# Altium PCB PCB2.PcbDoc (part 1 of 2)
Units mm, origin at the board's own origin, x right, y up, seen from the top; angles counter-clockwise.
Board outline 40 x 65 mm, 2 copper layers (Top Layer, Bottom Layer); 76 components, 45 nets, 266 pads, 528 vias.
Unrouted connection lines stored in the file: 3.
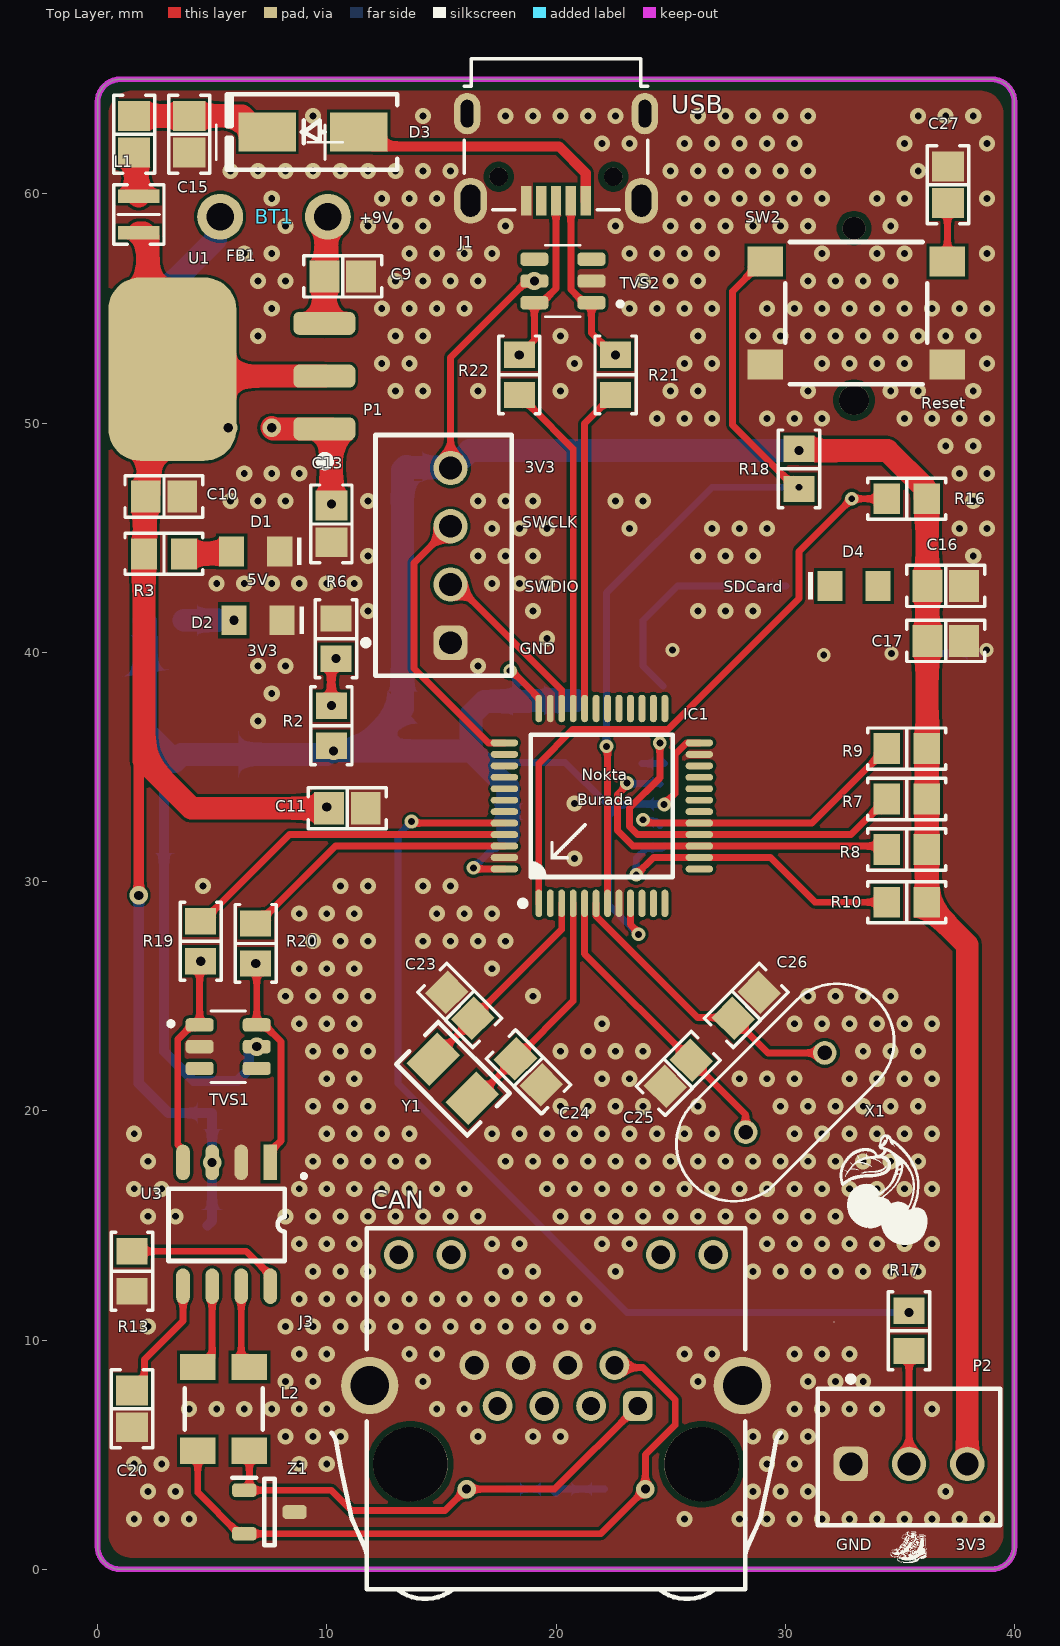
[diagram p0: Top Layer view]
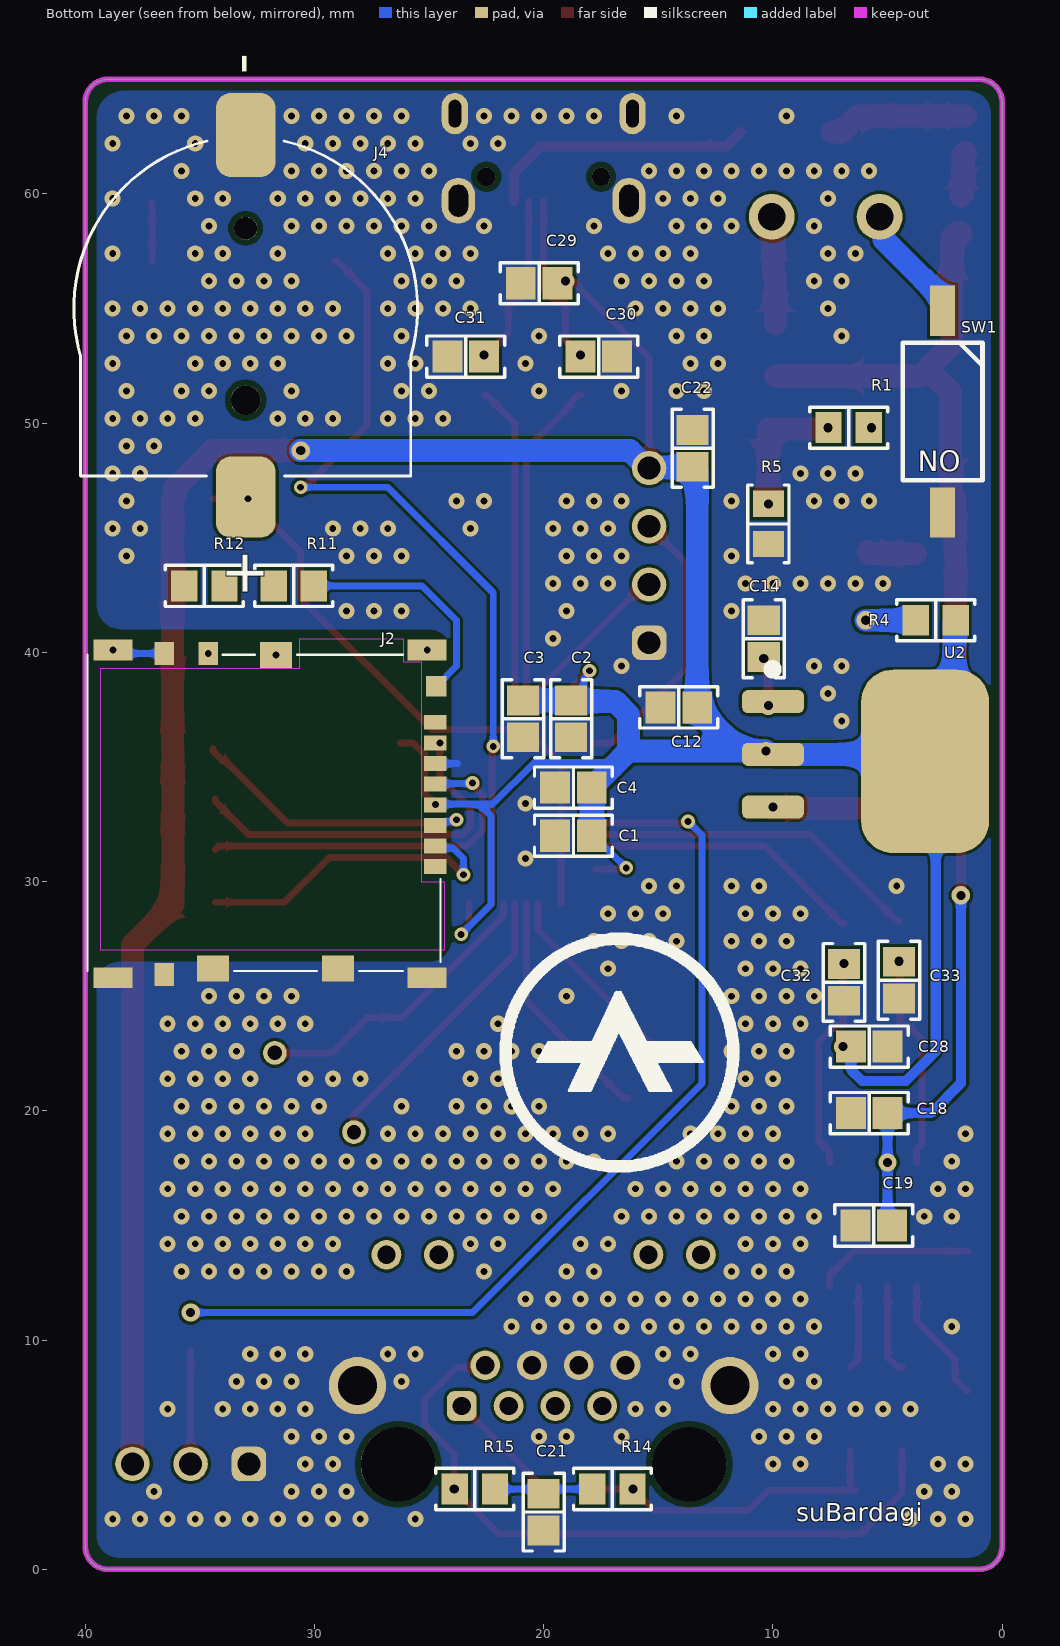
[diagram p1: Bottom Layer view, seen from below]
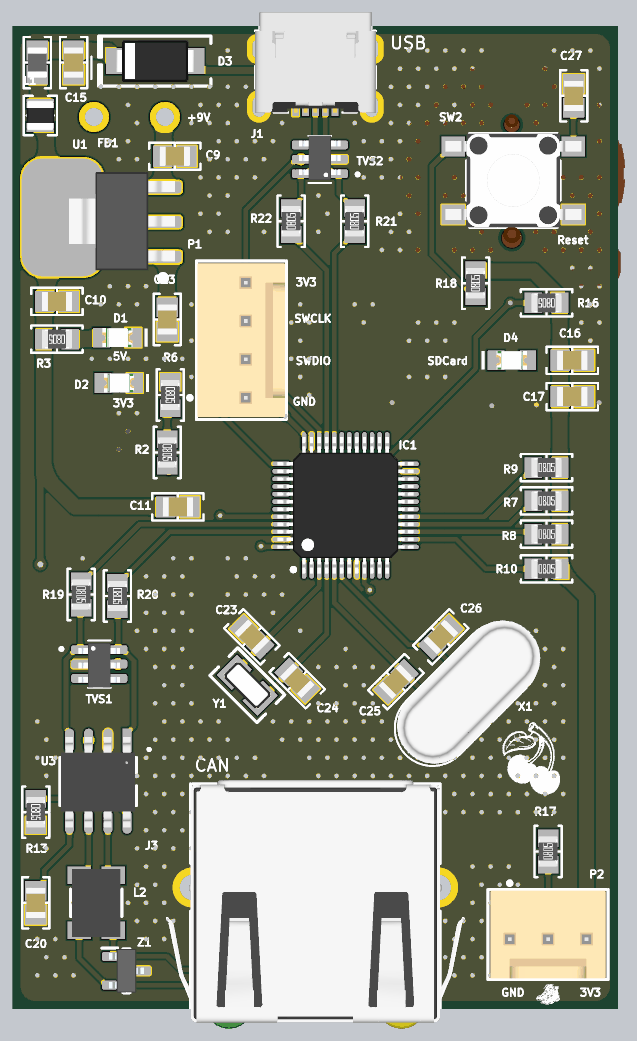
[diagram p2: 3D render of the assembled board from above, using the file's embedded part models]
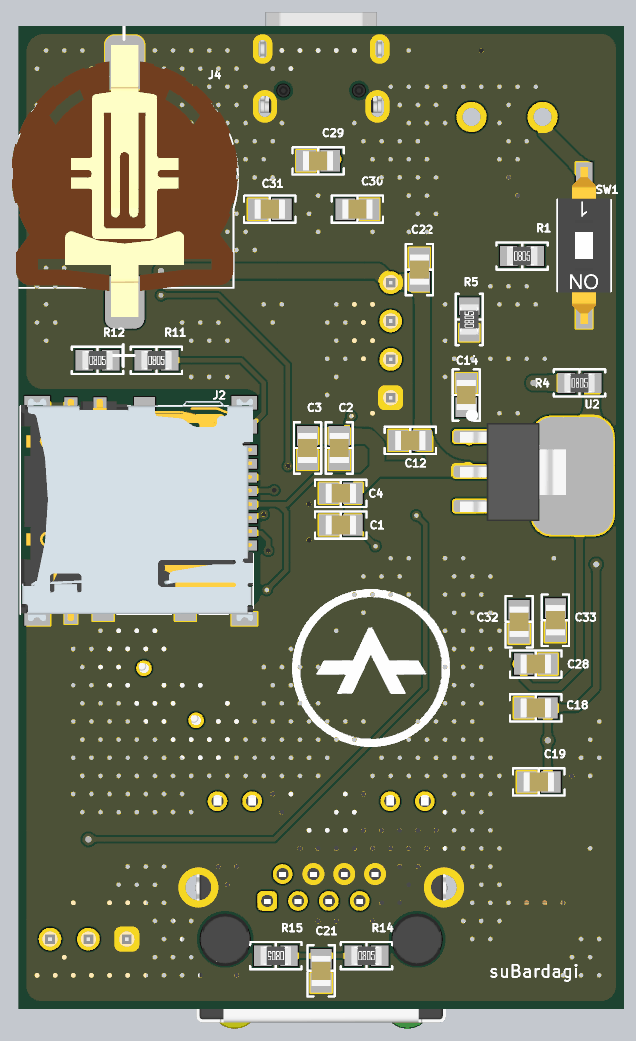
[diagram p3: 3D render of the assembled board from below, using the file's embedded part models]

## Layer stack, top to bottom
Top Solder: solder mask 0.0102, Solder Resist, Dk 3.5
Top Layer: signal copper 0.0356
Dielectric 1: dielectric 0.32, FR-4, Dk 4.8
Bottom Layer: signal copper 0.0356
Bottom Solder: solder mask 0.0102, Solder Resist, Dk 3.5

## Board outline
0,1 0,64 cw(c1,64) 1,65 39,65 cw(c39,64) 40,64 40,1 cw(c39,1) 39,0 1,0 cw(c1,1)

## Design rules (kind name [scope] priority, off if disabled: settings)
BoardOutlineClearance [All] p1: gap=0.2 ignorepadtopadclearanceinfootprint=FALSE
Clearance [All] p1: gap=0.127 ignorepadtopadclearanceinfootprint=FALSE except(0.25: Arc-Hole Track-Hole SMDPad-Hole THPad-Hole Via-Hole Fill-Hole Poly-Hole Region-Hole Text-Hole)
ComponentClearance [All] p1: gap=0.127 collisioncheckmode=3 verticalgap=0.127 showdistances=TRUE
DiffPairsRouting [All] p1: maxlimit=0.254 minlimit=0.127 mostfreqgap=0.127 toplayer_minwidth=0.127 toplayer_maxwidth=25.4 toplayer_prefwidth=0.127 bottomlayer_minwidth=0.127 bottomlayer_maxwidth=25.4 bottomlayer_prefwidth=0.127 maxuncoupledlength=12.7
Height [All] p1: minheight=0 maxheight=1816.048 prefheight=12.7
HoleSize [All] p1: absolutevalues=TRUE maxlimit=6.3 minlimit=0.3 maxpercent=80.000 minpercent=20.000
HoleToHoleClearance [All] p1: gap=0.25 allowstackedmicrovias=FALSE
MinimumAnnularRing [All] p1: minimumring=0.076
MinimumSolderMaskSliver [All] p1: minsoldermaskwidth=0
PlaneClearance [All] p1: clearance=0.127
PlaneConnect PlaneConnectPowerPads [InPadClass('PowerPads')] p1: planeconnectstyle=Direct reliefexpansion=0.508 reliefentries=4 reliefconductorwidth=0.254 reliefairgap=0.254
PlaneConnect [All] p2: pad.planeconnectstyle=Relief pad.reliefexpansion=0.3 pad.reliefentries=4 pad.reliefconductorwidth=0.127 pad.reliefairgap=0.127 via.planeconnectstyle=Direct via.reliefexpansion=0.3 via.reliefentries=4 via.reliefconductorwidth=0.127 via.reliefairgap=0.127
PolygonConnect PolygonConnect_1 [All vs IsNamedPolygon('NONET_L03_P-001')] p1: connectstyle=Direct reliefconductorwidth=0.254 reliefentries=4 polygonreliefangle="90 Angle" airgapwidth=0.254
PolygonConnect PolygonConnectPowerPads [All vs (InPadClass('PowerPads'))] p2: connectstyle=Direct reliefconductorwidth=0.254 reliefentries=4 polygonreliefangle="90 Angle" airgapwidth=0.254
PolygonConnect [All] p3: thpad.connectstyle=Relief thpad.reliefconductorwidth=0.127 thpad.reliefentries=4 thpad.polygonreliefangle="90 Angle" thpad.airgapwidth=0.127 smdpad.connectstyle=Relief smdpad.reliefconductorwidth=0.127 smdpad.reliefentries=4 smdpad.polygonreliefangle="90 Angle" smdpad.airgapwidth=0.127 via.connectstyle=Direct via.reliefconductorwidth=0.127 via.reliefentries=4 via.polygonreliefangle="90 Angle" via.airgapwidth=0.127
RoutingVias [All] p1: holewidth=0.3 width=0.6 viastyle="Through Hole" minholewidth=0.3 minwidth=0.6 maxholewidth=0.6 maxwidth=6.6
SilkToSilkClearance [All] p1: silktosilkclearance=0
SilkToSolderMaskClearance [IsPad] p1: minsilkscreentomaskgap=0.127 clearancetoexposedcopper=TRUE
SolderMaskExpansion [All] p1: expansion=0.075 istentingtop=FALSE
Width [All] p1: maxlimit=25.4 minlimit=0.127 preferedwidth=0.127 minimp=50.000000 maximp=50.000000 favimp=50.000000
20 further rules are at their usual default settings.

## Classes and differential pairs
component class Power: BT1 C1 C2 C3 C4 C9 C10 C11 C12 C13 C14 D1 D2 R1 R2 R3 R4 R5 R6 SW1 U1 U2
component class Microcontroller: C22 C23 C24 C25 C26 C27 IC1 J4 P1 P2 R16 R17 R18 SW2 X1 Y1
component class Filters: C28 C29 C30 C31 C32 C33 R19 R20 R21 R22 TVS1 TVS2
component class Communication: C15 C16 C17 C18 C19 C20 C21 D3 D4 FB1 J1 J2 J3 L1 L2 R7 R8 R9 R10 R11 R12 R13 R14 R15 U3 Z1

## Components (designator, comment, footprint, x,y, rotation, side; value= is the part's Value field where it differs from the comment)
BT1 "1294" BAT_1294 7.7,59 r270 top
C1 "10 µF" "CAP 0805_2012" 18.7,32 r0 bottom
C2 "10000 pF" "CAP 0805_2012" 18.8,37.1 r90 bottom
C3 "10 µF" "CAP 0805_2012" 20.9,37.1 r270 bottom
C4 "10000 pF" "CAP 0805_2012" 18.7,34.1 r180 bottom
C9 "10 µF" "CAP 0805_2012" 10.7,56.4 r180 top
C10 "100 µF" "CAP 0805_2012" 2.9,46.8 r180 top
C11 "10 µF" "CAP 0805_2012" 10.9,33.2 r180 top
C12 "100 µF" "CAP 0805_2012" 14.1,37.6 r180 bottom
C13 "10 µF" "CAP 0805_2012" 10.2,45.6 r90 top
C14 "10 µF" "CAP 0805_2012" 10.4,40.6 r270 bottom
C15 "0.1 µF" "CAP 0805_2012" 4,62.6 r90 top
C16 "0.1 µF" "CAP 0805_2012" 37,42.9 r180 top
C17 "10 µF" "CAP 0805_2012" 37,40.5 r180 top
C18 "0.1 µF" "CAP 0805_2012" 5.8,19.9 r180 bottom
C19 "10 µF" "CAP 0805_2012" 5.6,15 r0 bottom
C20 "10 µF" "CAP 0805_2012" 1.5,7 r90 top
C21 "4.7 µF" "CAP 0805_2012" 20,2.5 r90 bottom
C22 "0.1 µF" "CAP 0805_2012" 13.5,48.9 r90 bottom
C23 "1 pF" "CAP 0805_2012" 15.8,24.6 r315 top
C24 "1 pF" "CAP 0805_2012" 18.8,21.7 r135 top
C25 "18 pF" "CAP 0805_2012" 25.334,21.634 r45 top
C26 "18 pF" "CAP 0805_2012" 28.3,24.6 r225 top
C27 "0.1 µF" "CAP 0805_2012" 37.1,60.4 r270 top
C28 "0.1 µF" "CAP 0805_2012" 5.8,22.8 r0 bottom
C29 "0.1 µF" "CAP 0805_2012" 20.2,56.1 r180 bottom
C30 "2.2 µF" "CAP 0805_2012" 17.6,52.9 r0 bottom
C31 "2.2 µF" "CAP 0805_2012" 23.4,52.9 r180 bottom
C32 "2.2 µF" "CAP 0805_2012" 6.9,25.6 r90 bottom
C33 "2.2 µF" "CAP 0805_2012" 4.5,25.7 r90 bottom
D1 "Green, 3.2V, 140°" WL-SMCW_0805_150080xx75000 6.9,44.4 r180 top
D2 "Green, 3.2V, 140°" WL-SMCW_0805_150080xx75000 7,41.4 r180 top
D3 "BZG03C100-M3-08" "DO214AC SMA" 9.4,62.7 r180 top
D4 "Green, 3.2V, 140°" WL-SMCW_0805_150080xx75000 33,42.9 r0 top
FB1 "40 Ohms @ 100MHz" "FER 0805_2012" 1.6,62.6 r90 top
IC1 "STM32F103C6T7A" "ST LQFP-48 7X7MM" 22,33.3 r90 top
J1 "629105150521" 629105150521 20,62.6 r180 top
J2 "693071030811" 693071030811 32.2,33 r270 bottom
J3 "615008142121" 615008142121 20,7 r0 top
J4 "BC501SM-TR" "*MPD_BC501SM-TR_BC501SM-TR(Primary) - duplicate" 33,55 r270 bottom
L1 "22 µH" "IND 0806_2016" 1.8,59.1 r90 top
L2 "5000Ohm" WE-CNSW_1812 5.5,7 r270 top
P1 "61900411121" 61900411121 15.1,44.23 r270 top
P2 "61900311121" 61900311121 35.4,4.9 r180 top
R1 "130 Ohms" "RES 0805_2012" 6.7,49.8 r180 bottom
R2 "130 Ohms" "RES 0805_2012" 10.2,36.8 r270 top
R3 "470 Ohms" "RES 0805_2012" 2.9,44.3 r180 top
R4 "330 Ohms" "RES 0805_2012" 2.9,41.4 r180 bottom
R5 "390 Ohms" "RES 0805_2012" 10.2,45.6 r90 bottom
R6 "220 Ohms" "RES 0805_2012" 10.4,40.6 r270 top
R7 "10 kOhms" "RES 0805_2012" 35.3,33.6 r0 top
R8 "10 kOhms" "RES 0805_2012" 35.3,31.4 r0 top
R9 "10 kOhms" "RES 0805_2012" 35.3,35.8 r0 top
R10 "10 kOhms" "RES 0805_2012" 35.3,29.1 r0 top
R11 "0 Ohms" "RES 0805_2012" 30.9,42.9 r180 bottom
R12 "470 Ohms" "RES 0805_2012" 34.8,42.9 r180 bottom
R13 "10 kOhms" "RES 0805_2012" 1.5,13 r270 top
R14 "61.9 Ohms" "RES 0805_2012" 17,3.5 r180 bottom
R15 "61.9 Ohms" "RES 0805_2012" 23,3.5 r0 bottom
R16 "0 Ohms" "RES 0805_2012" 35.3,46.7 r180 top
R17 "10 kOhms" "RES 0805_2012" 35.4,10.4 r90 top
R18 "10 kOhms" "RES 0805_2012" 30.6,48 r90 top
R19 "56 Ohms" "RES 0805_2012" 4.5,27.4 r270 top
R20 "56 Ohms" "RES 0805_2012" 6.9,27.3 r270 top
R21 "56 Ohms" "RES 0805_2012" 22.6,52.1 r90 top
R22 "56 Ohms" "RES 0805_2012" 18.4,52.1 r90 top
SW1 "418121270801" 418121270801 2.6,50.5 r0 bottom
SW2 "430152043826" WS-TASV_L6W6H4.3_4301x20438x6 33.1,54.8 r0 top
TVS1 "SZTVS4201MR6T1G" SOP95P275X110-6N 5.7,22.8 r0 top
TVS2 "SZTVS4201MR6T1G" SOP95P275X110-6N 20.3,56.2 r180 top
U1 "LM1117IMPX-ADJ" "SOT-223-4 M" 7.2,52.1 r180 top
U2 "LM1117IMPX-ADJ" "SOT-223-4 M" 7.3,35.5 r180 bottom
U3 "MCP2551" MCP2551T-I/SN 5.75,15 r270 top
X1 "ECS-100-20-4VX" XTAL_ECS-100-20-4VX 30,20.8 r45 top
Y1 "32.768 kHz" "ABRACON ABS07" 15.5,21.4 r315 top
Z1 "PESD2CAN,215" SOT95P230X110-3N 7.5,2.5 r0 top

## Footprints (in the part's own frame and the unit in brackets; to place one, negate y for a bottom-side part, rotate by r counter-clockwise, add the part's x,y. Pads: shape width x height; smd on the part's side, far side on the other; paste and mask are expansions set on the pad)
61900311121 [mm] "2.54mm Male Locking Header, 3p"
  rrect50% 1.5x1.5 hole 1: 1(2.54,0.3)
  round 1.5 hole 1: 2(0,0.3) 3(-2.54,0.3)
  silkscreen extent -3.98,-3.52 3.98,2.98, body extent -3.81,-2.9 3.81,2.9, height 11.53
61900411121 [mm] "2.54mm Male Locking Header, 4p"
  rrect50% 1.5x1.5 hole 1: 1(3.81,0.3)
  round 1.5 hole 1: 2(1.27,0.3) 3(-1.27,0.3) 4(-3.81,0.3)
  silkscreen extent -5.25,-3.52 5.25,2.98, body extent -5.08,-2.9 5.08,2.9, height 11.53
418121270801 [mm] "2.54 mm small compact SMD with raised actuator, 01p"
  rect 1.1x2.2 smd: 1(0,-4.4) 2(0,4.4)
  silkscreen extent -1.74,-3 1.74,3, body extent -1.74,-5.2 1.74,5.2, height 3.77
615008142121 [mm] "Modular Jack Horizontal Shielded with LED and EMI Panel Finger 8P8C Tab Up"
  rrect50% 1.3x1.3 hole 0.8: 1(3.57,0.125)
  round 1.3 hole 0.8: 2(2.55,1.905) 3(1.53,0.125) 4(0.51,1.905) 5(-0.51,0.125) 6(-1.53,1.905) 7(-2.55,0.125) 8(-3.57,1.905) 9(6.86,6.725) 10(4.57,6.725) 11(-4.57,6.725) 12(-6.86,6.725)
  round 3.25 hole 3.25 unplated: M1(-6.35,-2.415) M2(6.35,-2.415)
  round 2.5 hole 1.7: Shell(-8.125,1.015) Shell(8.125,1.015)
  silkscreen extent -9.79,-8.29 9.79,7.87, body extent -9.88,-8.33 9.88,8.12, height 15.13
629105150521 [mm] "Micro USB 2.0 SMT Type B Horizontal 5 Contacts High Current"
  rect 0.45x1.3 smd: 1(-1.3,2.9) 2(-0.65,2.9) 3(0,2.9) 4(0.65,2.9) 5(1.3,2.9)
  round 0.8 hole 0.8 unplated: MH1(-2.5,1.85) MH2(2.5,1.85)
  oval 1.15x1.8 hole 0.55 slot 1.2 at 90 deg: Shell(-3.875,-0.9) Shell(3.875,-0.9)
  oval 1.45x2 hole 0.85 slot 1.4 at 90 deg: Shell(-3.725,2.9) Shell(3.725,2.9)
  silkscreen extent -4,-3.3 4,3.3, body extent -4,-3.3 4,3.3, height 2.75
693071030811 [mm] "Micro SD Card Connector"
  rect 0.65x1 smd: 1(2.35,7.47) 2(1.45,7.47) 3(0.55,7.47) 4(-0.35,7.47) 5(-1.25,7.47) 6(-2.15,7.47) 7(-3.05,7.47) 8(-3.95,7.47)
  rect 0.9x0.9 smd: 9(-5.52,7.52)
  rect 1.13x1.4 smd: 10(-6.89,0.52) 11(6.79,-2.23) 11(6.79,3.22)
  rect 0.9x1.7 smd: 11(-7.1,-6.58) 11(-7.1,7.12) 11(7.2,-6.58) 11(7.2,7.12)
  rect 1x0.85 smd: 11(-6.95,-4.36) 11(-6.95,-2.43) 11(7.05,-4.36)
  Top Layer keep-out region: -7.6,1.57 -7.6,6.07 -6.6,6.07 -6.6,6.87 3,6.87 3,7.87 6,7.87 6,-7.13 -6.3,-7.13 -6.3,1.57
  silkscreen extent -6.9,-7.7 6.9,7.7, body extent -7.36,-7.65 7.36,7.7, height 1.3
"*MPD_BC501SM-TR_BC501SM-TR(Primary) - duplicate" [mm]
  rrect50% 3.66x2.6 smd: NEG(-7.57,0)
  round 1 hole 1 unplated: None(-3.5,0)
  round 1.3 hole 1.3 unplated: None(4,0)
  rrect50% 3.54x2.6 smd: POS(8.23,0)
  silkscreen extent -7.3,-7.49 7.3,7.49, body extent -8.75,-7.49 9.25,7.49, height 4.2
"ABRACON ABS07" [mm] "Crystal, 2-Leads, Body 3.20x1.50mm, IPC Medium Density"
  rect 1.4x1.9 smd: 1(-1.2,0) 2(1.2,0)
  silkscreen extent -2.2,-1.3 2.2,1.3, body extent -1.62,-0.77 1.63,0.78, height 0.9
BAT_1294 [mm]
  round 2 hole 1.2: N(0,-2.35) P(0,2.35)
  silkscreen extent -4,-2.52 -2.5,2.98
"CAP 0805_2012" [mm] "Chip Capacitor, 2-Leads, Body 2.00x1.20mm, IPC Medium Density"
  rect 1.3x1.4 smd: 1(-0.8,0) 2(0.8,0)
  silkscreen extent -1.7,-0.9 1.7,0.9, body extent -1,-0.64 1,0.64, height 1.26
"DO214AC SMA" [mm] "Molded Diode, 2-Leads, Body 4.30x2.60mm, IPC Medium Density"
  rect 2.5x1.7 smd: 1(-2,0) 2(2,0)
  silkscreen extent -3.68,-1.65 3.75,1.65, body extent -2.6,-1.37 2.6,1.37, height 2.4
"FER 0805_2012" [mm] "Chip Ferrite, 2-Leads, Body 2.00x1.20mm, IPC Medium Density"
  rect 1.3x1.4 smd: 1(-0.8,0) 2(0.8,0)
  silkscreen extent -1.7,-0.9 1.7,0.9, body extent -1,-0.64 1,0.64, height 1.26
"IND 0806_2016" [mm] "Chip Capacitor, 2-Leads, Body 2.00x1.20mm, IPC Medium Density"
  rect 0.6x1.8 smd: 1(-0.8,0) 2(0.8,0)
  silkscreen extent -1.3,-1.1 1.3,1.1, body extent -1.01,-0.91 1.01,0.91, height 1.81
MCP2551T-I/SN [mm]
  rect 1.55x0.6 smd: 1(-2.75,1.79)
  oval 1.55x0.6 smd: 2(-2.75,0.52) 3(-2.75,-0.75) 4(-2.75,-2.02) 5(2.65,-2.02) 6(2.65,-0.75) 7(2.65,0.52) 8(2.65,1.79)
  silkscreen extent -2.2,-2.65 1.55,3.3, body extent -2.99,-2.59 3.01,2.32, height 1.76
"RES 0805_2012" [mm] "Chip Resistor, 2-Leads, Body 2.00x1.25mm, IPC Medium Density"
  rect 1.15x1.35 smd: 1(-0.875,0) 2(0.875,0)
  silkscreen extent -1.7,-0.9 1.7,0.9, body extent -1,-0.62 1,0.63, height 0.6
SOP95P275X110-6N [mm]
  rrect50% 1.22x0.58 smd: 1(-1.245,0.95) 2(-1.245,0) 3(-1.245,-0.95) 4(1.245,-0.95) 5(1.245,0) 6(1.245,0.95)
  silkscreen extent -2.6,-1.56 0.75,1.56, body extent -1.38,-1.57 1.38,1.39, height 1.1
SOT95P230X110-3N [mm]
  rrect50% 1.05x0.6 smd: 1(-1.1,0.95) 2(-1.1,-0.95) 3(1.1,0)
  silkscreen extent -1.63,-1.45 0.23,1.5, body extent -1.15,-1.45 1.15,1.45, height 1.1
"SOT-223-4 M" [mm]
  rrect50% 2.7x1 smd paste-0.102 mask+0.051: 1(-2.696,2.351) 2(-2.696,0.051) 3(-2.696,-2.249)
  rrect50% 5.588x8.001 smd paste-0.102 mask+0.051: 4(3.937,-0.254)
  silkscreen extent -2.92,3.56 -2.52,3.96, body extent -3.5,-3.25 3.5,3.25, height 1.63
"ST LQFP-48 7X7MM" [mm] "LQFP, 48-Leads, Body 7.00x7.00mm, Pitch 0.50mm, IPC Medium Density"
  oval 1.2x0.3 smd: 1(-4.25,2.75) 2(-4.25,2.25) 3(-4.25,1.75) 4(-4.25,1.25) 5(-4.25,0.75) 6(-4.25,0.25) 7(-4.25,-0.25) 8(-4.25,-0.75) 9(-4.25,-1.25) 10(-4.25,-1.75) 11(-4.25,-2.25) 12(-4.25,-2.75) 25(4.25,-2.75) 26(4.25,-2.25) 27(4.25,-1.75) 28(4.25,-1.25) 29(4.25,-0.75) 30(4.25,-0.25) 31(4.25,0.25) 32(4.25,0.75) 33(4.25,1.25) 34(4.25,1.75) 35(4.25,2.25) 36(4.25,2.75)
  oval 0.3x1.2 smd: 13(-2.75,-4.25) 14(-2.25,-4.25) 15(-1.75,-4.25) 16(-1.25,-4.25) 17(-0.75,-4.25) 18(-0.25,-4.25) 19(0.25,-4.25) 20(0.75,-4.25) 21(1.25,-4.25) 22(1.75,-4.25) 23(2.25,-4.25) 24(2.75,-4.25) 37(2.75,4.25) 38(2.25,4.25) 39(1.75,4.25) 40(1.25,4.25) 41(0.75,4.25) 42(0.25,4.25) 43(-0.25,4.25) 44(-0.75,4.25) 45(-1.25,4.25) 46(-1.75,4.25) 47(-2.25,4.25) 48(-2.75,4.25)
  silkscreen extent -4.37,-3.1 3.1,3.57, body extent -4.51,-4.51 4.51,4.51, height 1.55
WE-CNSW_1812 [mm] "SMT Common Mode Line Filter, 4-leads, body 4.50x3.20mm"
  rect 1.15x1.55 smd: 1(-1.825,-1.125) 2(1.825,-1.125) 3(1.825,1.125) 4(-1.825,1.125)
  silkscreen extent -0.9,-1.7 0.9,1.7, body extent -2.25,-1.6 2.25,1.6, height 2.84
WL-SMCW_0805_150080xx75000 [mm] "SMD Mono-color Chip LED, body 2.0x1.25mm"
  rect 1.1x1.3 smd: 1(-1.05,0) 2(1.05,0)
  silkscreen extent -2,-0.6 -1.8,0.6, body extent -1,-0.63 1,0.62, height 0.7
WS-TASV_L6W6H4.3_4301x20438x6 [mm] "SMD Tact Switch, body 6x6mm"
  rect 1.55x1.3 smd: A1(-3.975,2.25) A2(3.975,2.25) B1(-3.975,-2.25) B2(3.975,-2.25)
  silkscreen extent -3.1,-3.1 3.1,3.1, body extent -4.5,-3.1 4.5,3.1, height 4.3
XTAL_ECS-100-20-4VX [mm]
  round 1.03 hole 0.63: 1(-2.44,0) 2(2.44,0)
  silkscreen extent -5.67,-2.5 5.67,2.5, body extent -5.47,-2.5 5.88,2.5, height 2.1

## Part data
BT1: library part Bat-1294, "9V battery holder", Package=None, Availability=Unavailable, MP=1294, Price=None
C1 C3: library part C0805C106K3PAC7800, "CAP CER 10UF 25V X5R 0805", Device Package="0805 (2012 Metric)", Manufacturer=KEMET, Operating Temperature="-55°C ~ 85°C", Supplier Part Number 1=399-11939-1-ND, Temperature Coefficient=X5R, Tolerance=±10%, Voltage - Rated=25V, Applications="Bypass, Decoupling", Capacitance="10 µF", ComponentLink1Description=Datasheet, ComponentLink1URL=https://api.kemet.com/component-edge/download/datasheet/C0805C106K3PAC7800.pdf, ComponentLink2Description="DigiKey Link", ComponentLink2URL=https://www.digikey.com/en/products/detail/kemet/C0805C106K3PAC7800/5267604, lastupdated="9.02.2024 20:15:18", Lifecycle Status=Active, Minimum Order=1, Mounting Type="Surface Mount, MLCC", Package / Case="0805 (2012 Metric)", Packaging=TapeAndReel, Part Number=C0805C106K3PAC7800, Part Status=Active, partid=18542, Price=0.03, Series="SMD Comm X5R", Size / Dimension="0.079\" L x 0.049\" W (2.00mm x 1.25mm)", Supplier 1=DigiKey, Thickness (Max)="0.057\" (1.45mm)"
C2 C4: library part C0805C103J3GECAUTO, "CAP CER 0805 10NF 25V C0G 5%", Device Package="0805 (2012 Metric)", Manufacturer=KEMET, Operating Temperature="-55°C ~ 125°C", Ratings=AEC-Q200, Supplier Part Number 1=399-C0805C103J3GECAUTOCT-ND, Temperature Coefficient="C0G, NP0", Tolerance=±5%, Voltage - Rated=25V, Applications="Automotive, ESD Protection", Capacitance="10000 pF", ComponentLink1Description=Datasheet, ComponentLink1URL=https://api.kemet.com/component-edge/download/datasheet/C0805C103J3GECAUTO.pdf, ComponentLink2Description="DigiKey Link", ComponentLink2URL=https://www.digikey.com/en/products/detail/kemet/C0805C103J3GECAUTO/8647361, Features="Low ESL", lastupdated="9.02.2024 20:15:09", Lifecycle Status=Active, Minimum Order=1, Mounting Type="Surface Mount, MLCC", Package / Case="0805 (2012 Metric)", Packaging=TapeAndReel, Part Number=C0805C103J3GECAUTO, Part Status=Active, partid=32681, Price=0.05, Series="ESD SMD Auto C0G", Size / Dimension="0.079\" L x 0.049\" W (2.00mm x 1.25mm)", Supplier 1=DigiKey, Thickness (Max)="0.039\" (1.00mm)"
C9 C11 C13 C14 C19 C20: library part CL21Y106KPQVPNE, "CAP CER 10UF 10V X7S 0805", Part Number=CL21Y106KPQVPNE
C10 C12: library part PMK212BBJ107MG-T, "CAP CER 100UF 2.5V X5R 0805", Part Number=PMK212BBJ107MG-T
C15 C16 C18 C22 C27 C28 C29: library part CC0805MRX7R9BB104, "CAP CER 0.1UF 50V X7R 0805", Device Package="0805 (2012 Metric)", Manufacturer=Yageo, Operating Temperature="-55°C ~ 125°C", Supplier Part Number 1=311-4351-1-ND, Temperature Coefficient=X7R, Tolerance=±20%, Voltage - Rated=50V, Applications="General Purpose", Capacitance="0.1 µF", ComponentLink1Description=Datasheet, ComponentLink1URL=https://www.yageo.com/upload/media/product/productsearch/datasheet/mlcc/UPY-GPHC_X7R_6.3V-to-50V_18.pdf, ComponentLink2Description="DigiKey Link", ComponentLink2URL=https://www.digikey.com/en/products/detail/yageo/CC0805MRX7R9BB104/5884281, lastupdated="9.02.2024 20:16:09", Lifecycle Status=Active, Minimum Order=1, Mounting Type="Surface Mount, MLCC", Package / Case="0805 (2012 Metric)", Packaging=TapeAndReel, Part Number=CC0805MRX7R9BB104, Part Status=Active, partid=2475, Price=0.01, Series=CC, Size / Dimension="0.079\" L x 0.049\" W (2.00mm x 1.25mm)", Supplier 1=DigiKey, Thickness (Max)="0.037\" (0.95mm)"
C17: library part CL21Y106KPQVPNE, "CAP CER 10UF 10V X7S 0805", Device Package="0805 (2012 Metric)", Manufacturer="Samsung Electro-Mechanics", Operating Temperature="-55°C ~ 125°C", Ratings=AEC-Q200, Supplier Part Number 1=1276-6685-1-ND, Temperature Coefficient=X7S, Tolerance=±10%, Voltage - Rated=10V, Applications=Automotive, Capacitance="10 µF", ComponentLink1Description=Datasheet, ComponentLink1URL=http://www.samsungsem.com/kr/support/product-search/mlcc/CL21Y106KPQVPNE.jsp, ComponentLink2Description="DigiKey Link", ComponentLink2URL=https://www.digikey.com/en/products/detail/samsung-electro-mechanics/CL21Y106KPQVPNE/5961169, lastupdated="9.02.2024 20:16:08", Lifecycle Status=Active, Minimum Order=1, Mounting Type="Surface Mount, MLCC", Package / Case="0805 (2012 Metric)", Packaging=TapeAndReel, Part Number=CL21Y106KPQVPNE, Part Status=Active, partid=2979, Price=0.06, Series=CL, Size / Dimension="0.079\" L x 0.049\" W (2.00mm x 1.25mm)", Supplier 1=DigiKey, Thickness (Max)="0.055\" (1.40mm)"
C21: library part CL21B475KAFNNNE, "CAP CER 4.7UF 25V X7R 0805", Device Package="0805 (2012 Metric)", Manufacturer="Samsung Electro-Mechanics", Operating Temperature="-55°C ~ 125°C", Supplier Part Number 1=1276-2969-1-ND, Temperature Coefficient=X7R, Tolerance=±10%, Voltage - Rated=25V, Applications="General Purpose", Capacitance="4.7 µF", ComponentLink1Description=Datasheet, ComponentLink1URL=http://www.samsungsem.com/kr/support/product-search/mlcc/CL21B475KAFNNNE.jsp, ComponentLink2Description="DigiKey Link", ComponentLink2URL=https://www.digikey.com/en/products/detail/samsung-electro-mechanics/CL21B475KAFNNNE/3888627, lastupdated="9.02.2024 20:16:07", Lifecycle Status=Active, Minimum Order=1, Mounting Type="Surface Mount, MLCC", Package / Case="0805 (2012 Metric)", Packaging=TapeAndReel, Part Number=CL21B475KAFNNNE, Part Status=Active, partid=3072, Price=0.08, Series=CL, Size / Dimension="0.079\" L x 0.049\" W (2.00mm x 1.25mm)", Supplier 1=DigiKey, Thickness (Max)="0.053\" (1.35mm)"
C23 C24: library part CC0805CRNPO9BN1R0, "CAP CER 1PF 50V C0G/NPO 0805", Device Package="0805 (2012 Metric)", Manufacturer=Yageo, Operating Temperature="-55°C ~ 125°C", Supplier Part Number 1=311-1089-1-ND, Temperature Coefficient="C0G, NP0", Tolerance=±0.25pF, Voltage - Rated=50V, Applications="General Purpose", Capacitance="1 pF", ComponentLink1Description=Datasheet, ComponentLink1URL=https://www.yageo.com/upload/media/product/productsearch/datasheet/mlcc/UPY-GP_NP0_16V-to-50V_17.pdf, ComponentLink2Description="DigiKey Link", ComponentLink2URL=https://www.digikey.com/en/products/detail/yageo/CC0805CRNPO9BN1R0/302823, lastupdated="9.02.2024 20:15:42", Lifecycle Status=Active, Minimum Order=1, Mounting Type="Surface Mount, MLCC", Package / Case="0805 (2012 Metric)", Packaging=TapeAndReel, Part Number=CC0805CRNPO9BN1R0, Part Status=Active, partid=12750, Price=0.01, Series=CC, Size / Dimension="0.079\" L x 0.049\" W (2.00mm x 1.25mm)", Supplier 1=DigiKey, Thickness (Max)="0.024\" (0.60mm)"
C25 C26: library part VJ0805A180JXXCW1BC, "CAP CER 18PF 25V C0G/NP0 0805", Device Package="0805 (2012 Metric)", Manufacturer="Vishay Vitramon", Operating Temperature="-55°C ~ 125°C", Supplier Part Number 1=720-VJ0805A180JXXCW1BCCT-ND, Temperature Coefficient="C0G, NP0", Tolerance=±5%, Voltage - Rated=25V, Applications="General Purpose", Capacitance="18 pF", ComponentLink1Description=Datasheet, ComponentLink1URL=https://www.vishay.com/docs/28548/vjw1bcbascomseries.pdf, ComponentLink2Description="DigiKey Link", ComponentLink2URL=https://www.digikey.com/en/products/detail/vishay-vitramon/VJ0805A180JXXCW1BC/8307782, lastupdated="9.02.2024 20:15:03", Lifecycle Status=Active, Minimum Order=1, Mounting Type="Surface Mount, MLCC", Package / Case="0805 (2012 Metric)", Packaging=TapeAndReel, Part Number=VJ0805A180JXXCW1BC, Part Status=Active, partid=31672, Price=0.01, Series="VJ W1BC", Size / Dimension="0.079\" L x 0.049\" W (2.00mm x 1.25mm)", Supplier 1=DigiKey, Thickness (Max)="0.028\" (0.70mm)"
C30 C31 C32 C33: library part TMK212B7225MG-TR, "CAP CER 2.2UF 25V X7R 0805", Device Package="0805 (2012 Metric)", Manufacturer="Taiyo Yuden", Operating Temperature="-55°C ~ 125°C", Supplier Part Number 1=587-4932-1-ND, Temperature Coefficient=X7R, Tolerance=±20%, Voltage - Rated=25V, Applications="SMPS Filtering", Capacitance="2.2 µF", ComponentLink1Description=Datasheet, ComponentLink1URL=https://www.yuden.co.jp/productdata/catalog/mlcc01_e.pdf, ComponentLink2Description="DigiKey Link", ComponentLink2URL=https://www.digikey.com/en/products/detail/taiyo-yuden/TMK212B7225MG-TR/6563525, lastupdated="9.02.2024 20:16:05", Lifecycle Status=Active, Minimum Order=1, Mounting Type="Surface Mount, MLCC", Package / Case="0805 (2012 Metric)", Packaging=TapeAndReel, Part Number=TMK212B7225MG-TR, Part Status=Active, partid=3807, Price=0.04, Series=M, Size / Dimension="0.079\" L x 0.049\" W (2.00mm x 1.25mm)", Supplier 1=DigiKey, Thickness (Max)="0.053\" (1.35mm)"
D1 D2 D4: library part 150080GS75000, "WL-SMCW Mono-color Chip LED Waterclear, size 0805, Green, 3.2V, 140°", Case/Size Code=0805, Emitting Color=Green, Forward Voltage=3.2V, Manufacturer="Wurth Elektronik", Operating Temperature Max=85°C, Operating Temperature Min=-40°C, Category="Signal LEDs", Chip Technology=InGaN, ComponentLink1Description="Website Link", ComponentLink1URL=https://www.we-online.com/redexpert/article/150080GS75000?ad, ComponentLink2Description="Datasheet Link", ComponentLink2URL=https://www.we-online.com/redexpert/spec/150080GS75000?ad, Dominant Wavelength=525nm, Height=0.7mm, Length=2mm, Luminous Intensity=450mcd, Manufacturer Part Number=150080GS75000, Match Code=WL-SMCW, Mount="Surface Mount", Packaging="Tape and Reel", Peak Wavelength=515nm, Viewing Angle=140°, Width=1.25mm
D3: "DIODE ZENER 100V 1.25W DO214AC", Current - Reverse Leakage @ Vr="1µA @ 75V", Manufacturer="Vishay Semiconductor Diodes Division", Operating Temperature="150°C (TJ)", Package / Case="DO-214AC, SMA", Power - Max=1.25W, Supplier Device Package="DO-214AC (SMA)", Supplier Part Number 1=BZG03C100-M3-08GICT-ND, Tolerance=±6%, Voltage - Forward (Vf) (Max) @ If="1.2V @ 500mA", Voltage - Zener (Nom) (Vz)=100V, ComponentLink1Description=Datasheet, ComponentLink1URL=http://www.vishay.com/docs/86138/bzg03c-m-series.pdf, ComponentLink2Description="DigiKey Link", ComponentLink2URL=http://digikey.com/product-detail/en/vishay-semiconductor-diodes-division/BZG03C100-M3-08/BZG03C100-M3-08GICT-ND/8554991, lastupdated="3.06.2024 19:55:28", Lifecycle Status=Active, Minimum Order=1, Mounting Type="Surface Mount", Packaging=TapeAndReel, Part Number=BZG03C100-M3-08, Part Status=Active, partid=1296, Price=0.18, Series=BZG03C-M, Supplier 1=DigiKey, Impedance (Max) (Zzt)="200 Ohms"
FB1: library part ILBB0805ER400V, "FERRITE BEAD 40 OHM 0805 1LN", Current Rating (Max)=300mA, DC Resistance (DCR) (Max)=150mOhm, Manufacturer="Vishay Dale", Package / Case="0805 (2012 Metric)", Supplier Part Number 1=ILBB0805ER400V-ND, ComponentLink1Description=Datasheet, ComponentLink1URL=https://www.vishay.com/docs/34025/ilbb0805.pdf, ComponentLink2Description="DigiKey Link", ComponentLink2URL=http://digikey.com/product-detail/en/vishay-dale/ILBB0805ER400V/ILBB0805ER400V-ND/2574916, Height (Max)="0.043\" (1.10mm)", lastupdated="30.08.2020 20:58:50", Lifecycle Status=Active, Minimum Order=8000, Mounting Type="Surface Mount", Number of Lines=1, Packaging=TapeAndReel, Part Number=ILBB0805ER400V, partid=2358, Price=0.02, Series=ILBB-0805, Size / Dimension="0.079\" L x 0.049\" W (2.00mm x 1.25mm)", Supplier 1=DigiKey, Impedance @ Frequency="40 Ohms @ 100MHz"
IC1: "IC MCU 32BIT 32KB FLASH 48LQFP", Device Package=48-LQFP, Manufacturer=STMicroelectronics, Operating Temperature="-40°C ~ 105°C (TA)", Supplier Device Package="48-LQFP (7x7)", Supplier Part Number 1=497-11516-ND, Voltage - Supply (Vcc/Vdd)="2V ~ 3.6V", ComponentLink1Description=Datasheet, ComponentLink1URL=http://www.st.com/content/ccc/resource/technical/document/datasheet/0d/93/e0/d7/77/bf/4c/54/CD00210843.pdf/files/CD00210843.pdf/jcr:content/translations/en.CD00210843.pdf, ComponentLink2Description="DigiKey Link", ComponentLink2URL=//digikey.com/product-detail/en/stmicroelectronics/STM32F103C6T7A/497-11516-ND/2035348, Connectivity="CANbus, I²C, IrDA, LINbus, SPI, UART/USART, USB", Core Processor="ARM® Cortex®-M3", Core Size=32-Bit, Data Converters="A/D 10x12b", lastupdated="4.12.2019 05:20:26", Lifecycle Status=0, Minimum Order=1, Mounting Type="Surface Mount", Number of I/O=37, Oscillator Type=Internal, Package / Case=48-LQFP, Packaging=Tray, Part Number=STM32F103C6T7A, Part Status=Active, partid=102, Peripherals="DMA, Motor Control PWM, PDR, POR, PVD, PWM, Temp Sensor, WDT", Price=4.52, Program Memory Size="32KB (32K x 8)", Program Memory Type=FLASH, RAM Size="10K x 8", Series=STM32F1, Speed=72MHz, Supplier 1=DigiKey
J1: "WR-COM Micro USB 2.0 SMT Type B Horizontal 5 Contacts High Current", Manufacturer="Wurth Elektronik", Operating Temperature Max=85°C, Operating Temperature Min=-40°C, Rated Current=3A, Working Voltage="30V (AC)", Application="Micro USB 2.0", Category="Input/Output Connectors", ComponentLink1Description="Website Link", ComponentLink1URL=https://www.we-online.com/redexpert/article/629105150521?ad, ComponentLink2Description="Datasheet Link", ComponentLink2URL=https://www.we-online.com/redexpert/spec/629105150521?ad, Gender=Receptacle, Manufacturer Part Number=629105150521, Match Code=WR-USB, Mount="Surface Mount", Number of Pins=5, Number of Ports=1, Orientation=Horizontal, Packaging="Tape and Reel", Interface Type="Type B"
J2: "WR-CRD Micro SD Card Connector Push & Push", Contact Resistance=100mOhm, Manufacturer="Wurth Elektronik", Operating Temperature Max=85°C, Operating Temperature Min=-25°C, Rated Current=0.5A, Withstanding Voltage=500VAC, Working Voltage=30VAC, Category="Input/Output Connectors", ComponentLink1Description="Website Link", ComponentLink1URL=https://www.we-online.com/redexpert/article/693071030811?ad, ComponentLink2Description="Datasheet Link", ComponentLink2URL=https://www.we-online.com/redexpert/spec/693071030811?ad, Gender=Socket, Manufacturer Part Number=693071030811, Match Code=WR-CRD, Mount="Surface Mount", Number of Pins=8, Packaging="Tape and Reel", Type="Push & Push"
J3: "WR-MJ Modular Jack THT Horizontal Shielded 8P8C Tab Up", Contact Resistance=20mOhm, Manufacturer="Wurth Elektronik", Operating Temperature Max=85°C, Operating Temperature Min=-40°C, Rated Current=1.5A, Withstanding Voltage=1000VAC, Working Voltage=120VAC, Insulation Resistance=500MOhm, Category="Input/Output Connectors", ComponentLink1Description="Website Link", ComponentLink1URL=https://www.we-online.com/redexpert/article/615008142121?ad, ComponentLink2Description="Datasheet Link", ComponentLink2URL=https://www.we-online.com/redexpert/spec/615008142121?ad, LED="Bipolar Y/G", Manufacturer Part Number=615008142121, Match Code=WR-MJ, Mount="Through Hole", Number of Pins=8P8C, Number of Ports=1, Orientation=Horizontal, Packaging=Tray, Shielding=Yes
J4: "Holder Coin Cell For Cr1220 Smd", Package="DFN-8 MPD", Digi-Key_Part_Number=BC501SM-TRCT-ND, Digi-Key_Purchase_URL=https://www.digikey.com/product-detail/en/mpd-memory-protection-devices/BC501SM-TR/BC501SM-TRCT-ND/5418194?utm_source=snapeda&utm_medium=aggregator&utm_campaign=symbol, MF="MPD _Memory", MP=BC501SM-TR, SnapEDA_Link=https://www.snapeda.com/parts/BC501SM-TR/MPD%20%28Memory%20Protection%20Devices%29/view-part/479427/?ref=snap
L1: library part LSQPB201616T220M, "FIXED IND 22UH 310MA 1 OHM SMD", Current Rating (Amps)="310 mA", DC Resistance (DCR)="1.3Ohm Max", Device Package="0806 (2016 Metric)", Frequency - Self Resonant=24MHz, Manufacturer="Taiyo Yuden", Operating Temperature="-40°C ~ 105°C", Supplier Device Package=0806, Supplier Part Number 1=587-LSQPB201616T220MCT-ND, Tolerance=±20%, Inductance Frequency - Test="100 kHz", ComponentLink1Description=Datasheet, ComponentLink1URL=https://mm.digikey.com/Volume0/opasdata/d220001/medias/docus/6025/LSQPB201616T220M_SS.pdf, ComponentLink2Description="DigiKey Link", ComponentLink2URL=https://www.digikey.com/en/products/detail/taiyo-yuden/LSQPB201616T220M/16660797, Height - Seated (Max)="0.071\" (1.80mm)", lastupdated="3.06.2024 20:13:57", Lifecycle Status=Active, Material - Core=Ferrite, Minimum Order=1, Mounting Type="Surface Mount", Package / Case="0806 (2016 Metric)", Packaging=TapeAndReel, Part Number=LSQPB201616T220M, partid=7265, Price=0.09, Series=LSQP, Shielding=Unshielded, Size / Dimension="0.079\" L x 0.063\" W (2.00mm x 1.60mm)", Supplier 1=DigiKey, Type=Wirewound, Inductance="22 µH"
L2: library part 744235101, "WE-CNSW SMT Common Mode Line Filter, size 1812, 5000Ohm, 100uH, 60V", Case/Size Code=1812, DC Resistance Max=2Ohm, Manufacturer="Wurth Elektronik", Operating Temperature Max=125°C, Operating Temperature Min=-40°C, Rated Current=0.15A, Rated Voltage=60V, Inductance=100uH, Insulation Test Voltage (AC)=125V, Category="Common Mode Chokes", ComponentLink1Description="Website Link", ComponentLink1URL=https://www.we-online.com/redexpert/article/744235101?ad, ComponentLink2Description="Datasheet Link", ComponentLink2URL=https://www.we-online.com/redexpert/spec/744235101?ad, Height=2.8mm, Length=4.5mm, Manufacturer Part Number=744235101, Match Code=WE-CNSW, Mount="Surface Mount", Packaging="Tape and Reel", Width=3.2mm, Winding Style=bifiliar, Impedance @10MHz=5000Ohm
P1: "WR-WTB THT Male Vertical Locking Header, pitch 2.54mm, 4pins", Contact Resistance=20mOhm, Manufacturer="Wurth Elektronik", Operating Temperature Max=105°C, Operating Temperature Min=-40°C, Rated Current=3A, Withstanding Voltage=1000VAC, Working Voltage=250VAC, Category="Wire-to-Board Connectors", ComponentLink1Description="Website Link", ComponentLink1URL=https://www.we-online.com/redexpert/article/61900411121?ad, ComponentLink2Description="Datasheet Link", ComponentLink2URL=https://www.we-online.com/redexpert/spec/61900411121?ad, Gender=Male, Height=11.5mm, Length=10.16mm, Manufacturer Part Number=61900411121, Match Code=WR-WTB, Mount="Through Hole", Number of Pins=4, Number of Rows=1, Orientation=Vertical, Packaging=Bag, Pitch=2.54mm, Width=5.8mm
P2: "WR-WTB THT Male Vertical Locking Header, pitch 2.54mm, 3pins", Contact Resistance=20mOhm, Manufacturer="Wurth Elektronik", Operating Temperature Max=105°C, Operating Temperature Min=-40°C, Rated Current=3A, Withstanding Voltage=1000VAC, Working Voltage=250VAC, Category="Wire-to-Board Connectors", ComponentLink1Description="Website Link", ComponentLink1URL=https://www.we-online.com/redexpert/article/61900311121?ad, ComponentLink2Description="Datasheet Link", ComponentLink2URL=https://www.we-online.com/redexpert/spec/61900311121?ad, Gender=Male, Height=11.5mm, Length=7.62mm, Manufacturer Part Number=61900311121, Match Code=WR-WTB, Mount="Through Hole", Number of Pins=3, Number of Rows=1, Orientation=Vertical, Packaging=Bag, Pitch=2.54mm, Width=5.8mm
R1 R2: library part 3-2176091-5, "RES SMD 130 OHM 0.1% 1/4W 0805", Device Package="0805 (2012 Metric)", Manufacturer="TE Connectivity Passive Product", Operating Temperature="-55°C ~ 155°C", Power (Watts)="0.25W, 1/4W", Supplier Device Package=0805, Supplier Part Number 1=A110458CT-ND, Temperature Coefficient=±25ppm/°C, Tolerance=±0.1%, ComponentLink1Description=Datasheet, ComponentLink1URL=https://www.te.com/commerce/DocumentDelivery/DDEController?Action=srchrtrv&DocNm=1773272&DocType=DS&DocLang=English, ComponentLink2Description="DigiKey Link", ComponentLink2URL=https://www.digikey.com/en/products/detail/te-connectivity-passive-product/3-2176091-5/4033926, Composition="Thin Film", Height - Seated (Max)="0.026\" (0.65mm)", lastupdated="8.02.2024 21:00:46", Lifecycle Status=Active, Minimum Order=1, Number of Terminations=2, Package / Case="0805 (2012 Metric)", Packaging=TapeAndReel, Part Number=3-2176091-5, Part Status=Active, partid=49761, Price=0.14, Resistance="130 Ohms", Series="RP73P, Holsworthy", Size / Dimension="0.079\" L x 0.049\" W (2.00mm x 1.25mm)", Supplier 1=DigiKey
R3 R12: library part 3430A2F470RTDF, "3430 A2 1% 470R 100PPM 1K RL", Device Package="0805 (2012 Metric)", Manufacturer="TE Connectivity Passive Product", Operating Temperature="-55°C ~ 155°C", Power (Watts)=1W, Ratings=AEC-Q200, Supplier Device Package=0508, Supplier Part Number 1=1712-3430A2F470RTDFCT-ND, Temperature Coefficient=±100ppm/°C, Tolerance=±1%, ComponentLink2Description="DigiKey Link", ComponentLink2URL=https://www.digikey.com/en/products/detail/te-connectivity-passive-product/3430A2F470RTDF/17763718, Composition="Thick Film", Features="Automotive AEC-Q200", Height - Seated (Max)="0.026\" (0.65mm)", lastupdated="8.02.2024 21:00:03", Lifecycle Status=Active, Minimum Order=1, Number of Terminations=2, Package / Case="0805 (2012 Metric)", Packaging=TapeAndReel, Part Number=3430A2F470RTDF, Part Status=Active, partid=77780, Price=0.02, Resistance="470 Ohms", Series=3430, Size / Dimension="0.049\" L x 0.079\" W (1.25mm x 2.00mm)", Supplier 1=DigiKey
R4: library part 3430A2F330RTDF, "3430 A2 1% 330R 100PPM 1K RL", Device Package="0805 (2012 Metric)", Manufacturer="TE Connectivity Passive Product", Operating Temperature="-55°C ~ 155°C", Power (Watts)=1W, Ratings=AEC-Q200, Supplier Device Package=0508, Supplier Part Number 1=1712-3430A2F330RTDFCT-ND, Temperature Coefficient=±100ppm/°C, Tolerance=±1%, ComponentLink2Description="DigiKey Link", ComponentLink2URL=https://www.digikey.com/en/products/detail/te-connectivity-passive-product/3430A2F330RTDF/17762827, Composition="Thick Film", Features="Automotive AEC-Q200", Height - Seated (Max)="0.026\" (0.65mm)", lastupdated="8.02.2024 21:00:04", Lifecycle Status=Active, Minimum Order=1, Number of Terminations=2, Package / Case="0805 (2012 Metric)", Packaging=TapeAndReel, Part Number=3430A2F330RTDF, Part Status=Active, partid=77524, Price=0.02, Resistance="330 Ohms", Series=3430, Size / Dimension="0.049\" L x 0.079\" W (1.25mm x 2.00mm)", Supplier 1=DigiKey
R5: library part 3430A2F390RTDF, "3430 A2 1% 390R 100PPM 1K RL", Device Package="0805 (2012 Metric)", Manufacturer="TE Connectivity Passive Product", Operating Temperature="-55°C ~ 155°C", Power (Watts)=1W, Ratings=AEC-Q200, Supplier Device Package=0508, Supplier Part Number 1=1712-3430A2F390RTDFCT-ND, Temperature Coefficient=±100ppm/°C, Tolerance=±1%, ComponentLink2Description="DigiKey Link", ComponentLink2URL=https://www.digikey.com/en/products/detail/te-connectivity-passive-product/3430A2F390RTDF/17763108, Composition="Thick Film", Features="Automotive AEC-Q200", Height - Seated (Max)="0.026\" (0.65mm)", lastupdated="8.02.2024 21:00:03", Lifecycle Status=Active, Minimum Order=1, Number of Terminations=2, Package / Case="0805 (2012 Metric)", Packaging=TapeAndReel, Part Number=3430A2F390RTDF, Part Status=Active, partid=77771, Price=0.02, Resistance="390 Ohms", Series=3430, Size / Dimension="0.049\" L x 0.079\" W (1.25mm x 2.00mm)", Supplier 1=DigiKey
R6: library part CPF0805B220RE1, "RES SMD 220 OHM 0.1% 1/10W 0805", Device Package="0805 (2012 Metric)", Manufacturer="TE Connectivity Passive Product", Operating Temperature="-55°C ~ 155°C", Power (Watts)="0.1W, 1/10W", Supplier Device Package=0805, Supplier Part Number 1=A103177CT-ND, Temperature Coefficient=±25ppm/°C, Tolerance=±0.1%, ComponentLink1Description=Datasheet, ComponentLink1URL=https://www.te.com/commerce/DocumentDelivery/DDEController?Action=srchrtrv&DocNm=1773200&DocType=DS&DocLang=English, ComponentLink2Description="DigiKey Link", ComponentLink2URL=https://www.digikey.com/en/products/detail/te-connectivity-passive-product/CPF0805B220RE1/2382016, Composition="Thin Film", Height - Seated (Max)="0.026\" (0.65mm)", lastupdated="8.02.2024 21:02:21", Lifecycle Status=Active, Minimum Order=1, Number of Terminations=2, Package / Case="0805 (2012 Metric)", Packaging=TapeAndReel, Part Number=CPF0805B220RE1, Part Status=Active, partid=31853, Price=0.12, Resistance="220 Ohms", Series="CPF, Neohm", Size / Dimension="0.079\" L x 0.049\" W (2.00mm x 1.25mm)", Supplier 1=DigiKey
R7 R8 R9 R10 R13 R17 R18: library part 2176093-5, "RES SMD 10K OHM 0.1% 1/4W 0805", Device Package="0805 (2012 Metric)", Manufacturer="TE Connectivity Passive Product", Operating Temperature="-55°C ~ 155°C", Power (Watts)="0.25W, 1/4W", Supplier Device Package=0805, Supplier Part Number 1=A110639CT-ND, Temperature Coefficient=±25ppm/°C, Tolerance=±0.1%, ComponentLink1Description=Datasheet, ComponentLink1URL=https://www.te.com/commerce/DocumentDelivery/DDEController?Action=srchrtrv&DocNm=1773272&DocType=DS&DocLang=English, ComponentLink2Description="DigiKey Link", ComponentLink2URL=https://www.digikey.com/en/products/detail/te-connectivity-passive-product/2176093-5/4034107, Composition="Thin Film", Height - Seated (Max)="0.026\" (0.65mm)", lastupdated="8.02.2024 21:02:35", Lifecycle Status=Active, Minimum Order=1, Number of Terminations=2, Package / Case="0805 (2012 Metric)", Packaging=TapeAndReel, Part Number=2176093-5, Part Status=Active, partid=28478, Price=0.14, Resistance="10 kOhms", Series="RP73P, Holsworthy", Size / Dimension="0.079\" L x 0.049\" W (2.00mm x 1.25mm)", Supplier 1=DigiKey
R11 R16: library part 5107, "RES 0 OHM JUMPER 0805", Device Package="0805 (2012 Metric)", Manufacturer="Keystone Electronics", Power (Watts)="0.5W, 1/2W", Supplier Device Package=0805, Supplier Part Number 1=36-5107CT-ND, Tolerance=Jumper, ComponentLink1Description=Datasheet, ComponentLink1URL=http://www.keyelco.com/product-pdf.cfm?p=14350, ComponentLink2Description="DigiKey Link", ComponentLink2URL=https://www.digikey.com/en/products/detail/keystone-electronics/5107/7942981, Composition="Metal Element", Height - Seated (Max)="0.033\" (0.84mm)", lastupdated="8.02.2024 21:01:23", Lifecycle Status=Active, Minimum Order=1, Number of Terminations=2, Package / Case="0805 (2012 Metric)", Packaging=TapeAndReel, Part Number=5107, Part Status=Active, partid=45276, Price=0.16, Resistance="0 Ohms", Series=-, Size / Dimension="0.079\" L x 0.049\" W (2.00mm x 1.25mm)", Supplier 1=DigiKey
R14 R15: library part 2176091-4, "RES SMD 61.9 OHM 0.1% 1/4W 0805", Device Package="0805 (2012 Metric)", Manufacturer="TE Connectivity Passive Product", Operating Temperature="-55°C ~ 155°C", Power (Watts)="0.25W, 1/4W", Supplier Device Package=0805, Supplier Part Number 1=A110427CT-ND, Temperature Coefficient=±25ppm/°C, Tolerance=±0.1%, ComponentLink1Description=Datasheet, ComponentLink1URL=https://www.te.com/commerce/DocumentDelivery/DDEController?Action=srchrtrv&DocNm=1773272&DocType=DS&DocLang=English, ComponentLink2Description="DigiKey Link", ComponentLink2URL=https://www.digikey.com/en/products/detail/te-connectivity-passive-product/2176091-4/4033895, Composition="Thin Film", Height - Seated (Max)="0.026\" (0.65mm)", lastupdated="8.02.2024 21:01:14", Lifecycle Status=Active, Minimum Order=1, Number of Terminations=2, Package / Case="0805 (2012 Metric)", Packaging=TapeAndReel, Part Number=2176091-4, Part Status=Active, partid=46762, Price=0.14, Resistance="61.9 Ohms", Series="RP73P, Holsworthy", Size / Dimension="0.079\" L x 0.049\" W (2.00mm x 1.25mm)", Supplier 1=DigiKey
R19 R20 R21 R22: library part CPF0805B56RE1, "RES SMD 56 OHM 0.1% 1/10W 0805", Device Package="0805 (2012 Metric)", Manufacturer="TE Connectivity Passive Product", Operating Temperature="-55°C ~ 155°C", Power (Watts)="0.1W, 1/10W", Supplier Device Package=0805, Supplier Part Number 1=A103223CT-ND, Temperature Coefficient=±25ppm/°C, Tolerance=±0.1%, ComponentLink1Description=Datasheet, ComponentLink1URL=https://www.te.com/commerce/DocumentDelivery/DDEController?Action=srchrtrv&DocNm=1773200&DocType=DS&DocLang=English, ComponentLink2Description="DigiKey Link", ComponentLink2URL=https://www.digikey.com/en/products/detail/te-connectivity-passive-product/CPF0805B56RE1/2382003, Composition="Thin Film", Height - Seated (Max)="0.026\" (0.65mm)", lastupdated="8.02.2024 21:02:01", Lifecycle Status=Active, Minimum Order=1, Number of Terminations=2, Package / Case="0805 (2012 Metric)", Packaging=TapeAndReel, Part Number=CPF0805B56RE1, Part Status=Active, partid=36553, Price=0.12, Resistance="56 Ohms", Series="CPF, Neohm", Size / Dimension="0.079\" L x 0.049\" W (2.00mm x 1.25mm)", Supplier 1=DigiKey
SW1: "WS-DISV Small Compact SMT Dip Switch, Raised Actuator, pitch 2.54mm, 1p", Manufacturer="Wurth Elektronik", Operating Temperature Max=85°C, Operating Temperature Min=-40°C, Rated Current Non-Switching=100mA, Rated Current Switching=25mA, Rated Voltage Non-Switching=50VDC, Rated Voltage Switching=24VDC, Actuator Type="Raise Type", Category="Dip Switches", ComponentLink1Description="Website Link", ComponentLink1URL=https://www.we-online.com/redexpert/article/418121270801?ad, ComponentLink2Description="Datasheet Link", ComponentLink2URL=https://www.we-online.com/redexpert/spec/418121270801?ad, Contact Material="Copper Alloy", Contact Plating=Gold, Manufacturer Part Number=418121270801, Match Code=WS-DISV, Mount="Surface Mount", Number of Poles=1, Operation Force=600g, Packaging="Tape and Reel", Pitch=2.54mm
SW2: "WS-TASV SMT Tact Switch, L6 x W6 x H4.3mm, 260g, SPST-NO, 12V, 50mA", Manufacturer="Wurth Elektronik", Operating Temperature Max=85°C, Operating Temperature Min=-40°C, Rated Current=50mA, Rated Voltage (DC)=12V, Category="Tact Switches", Circuit=SPST-NO, ComponentLink1Description="Website Link", ComponentLink1URL=https://www.we-online.com/redexpert/article/430152043826?ad, ComponentLink2Description="Datasheet Link", ComponentLink2URL=https://www.we-online.com/redexpert/spec/430152043826?ad, Contact Material="Stainless Steel", Contact Plating=Silver, Height=4.3mm, Length=6mm, Manufacturer Part Number=430152043826, Match Code=WS-TASV, Mount="Surface Mount", Operation Force=260g, Packaging="Tape and Reel", Terminal Material="Copper Alloy", Terminal Plating=Silver, Washable=No, Width=6mm
TVS1 TVS2: library part SZTVS4201MR6T1G_1, Mfr_Name=onsemi, Supplier Part Number 1=863-SZTVS4201MR6T1G, Copyright="Copyright (C) 2021 Ultra Librarian. All rights reserved.", Manufacturer_Part_Number=SZTVS4201MR6T1G, RefDes=RefDes, Supplier 1=Mouser, Type=DEV
U1 U2: "LDO Regulator Pos 3.3V 0.8A 4-Pin(3+Tab) SOT-223 T/R", Case/Package=SOT-223, Dropout Voltage=1.2V, Manufacturer="Texas Instruments", Manufacturer Part Number=LM1117IMPX-3.3, Max Operating Temperature=125°C, Max Output Current=800mA, Max Input Voltage=15V, Min Operating Temperature=-40°C, Output Voltage=3.3V, Output Voltage Accuracy=1%, Package Quantity=2000, Quiescent Current=15mA, Supplier Part Number 1=926-M1117IMPXADJNOPB, Accuracy=1%, Category="Voltage Regulators - Linear", ComponentLink1Description=https://datasheet.ciiva.com/6588/lm1117-n-6588632.pdf?src-supplier=Digi-Key, ComponentLink1URL=https://datasheet.ciiva.com/6588/lm1117-n-6588632.pdf?src-supplier=Digi-Key, ComponentLink2Description=https://datasheet.ciiva.com/6588/lm1117-n-6588636.pdf?src-supplier=Digi-Key, ComponentLink2URL=https://datasheet.ciiva.com/6588/lm1117-n-6588636.pdf?src-supplier=Digi-Key, ComponentLink3Description=https://datasheet.ciiva.com/6588/lm1117-n-6588639.pdf?src-supplier=Digi-Key, ComponentLink3URL=https://datasheet.ciiva.com/6588/lm1117-n-6588639.pdf?src-supplier=Digi-Key, Lead Free="Contains Lead", Min Current Limit=800mA, Mount="Surface Mount", Number of Outputs=1, Number of Pins=4, Number of Regulators=1, Output Current=800mA, Output Type=Fixed, Packaging="Tape and Reel", Polarity=Positive, RoHS=No, Supplier 1=Mouser
U3: "MCP2551 CAN Transreciever 8Mbit/sn", Operating Temperature="-40°C ~ 125°C", Supplier Part Number 1=MCP2551-I/SN, Virtual Junction Temperature (Tvj)="-40°C ~ 150°C", Datasheet=https://www.nxp.com/docs/en/data-sheet/TJA1462.pdf, Differential Reciever Hysteresis=100mV, Supplier 1="Arrow Electronics", Transreciever Hysteresis=50mV, VCANH-VCANL="-40V ~ 40V"
X1: "ECS-100-20-4VX 10MHz", ESR (Equivalent Series Resistance)="80 Ohms", Frequency=10MHZ, Frequency Stability=±50ppm, Load Capacitance="20 pF", Manufacturer="ESC INC", Operating Mode=Fumdamental, Operating Temperature="-10°C ~ 70°C", Aging (First Year) @ 25°C="±5 ppm", Datasheet=https://ecsxtal.com/store/pdf/HC-49USS.pdf, Drive Level="500 uW", Frequency Tolerance=±50ppm, Lifcycle Status=Active, Mounting Type="Through Hole", Packaging=HC-49UCCX, Supplier 1="Arrow Electronics", Supplier Part Number 1=ECS-100-20-4VX
Y1: library part ABS07-32.768KHZ-6-T, "CRYSTAL 32.7680KHZ 6PF SMD", ESR (Equivalent Series Resistance)="70 kOhms", Frequency Tolerance=±20ppm, Load Capacitance=6pF, Manufacturer="Abracon LLC", Operating Mode=Fundamental, Operating Temperature="-40°C ~ 85°C", Package / Case="2-SMD, No Lead", Supplier Part Number 1=535-11898-1-ND, ComponentLink1Description=Datasheet, ComponentLink1URL=https://abracon.com/Resonators/ABS07.pdf, ComponentLink2Description="DigiKey Link", ComponentLink2URL=https://www.digikey.com/en/products/detail/abracon-llc/ABS07-32-768KHZ-6-T/3508065, Frequency="32.768 kHz", Height - Seated (Max)="0.035\" (0.90mm)", lastupdated="3.06.2024 20:02:04", Lifecycle Status=Active, Minimum Order=1, Mounting Type="Surface Mount", Packaging=TapeAndReel, Part Number=ABS07-32.768KHZ-6-T, Part Status=Active, partid=379, Price=0.37, Series=ABS07, Size / Dimension="0.126\" L x 0.059\" W (3.20mm x 1.50mm)", Supplier 1=DigiKey, Type="kHz Crystal (Tuning Fork)"
Z1: "Zener Diode", Manufacturer_Name=Nexperia, Mouser Part Number=771-PESD2CAN-T/R, RS Part Number=0508462, Datasheet Link=http://de.rs-online.com/webdocs/0b4d/0900766b80b4dbb6.pdf, Height=1.1mm, Manufacturer_Part_Number=PESD2CAN,215, Mouser Price/Stock=https://www.mouser.com/Search/Refine.aspx?Keyword=771-PESD2CAN-T%2FR, RS Price/Stock=http://uk.rs-online.com/web/p/products/0508462

## Via types
v1: diameter 0.7, hole 0.3, Top Layer to Bottom Layer, tented both sides, 492 vias
v2: diameter 0.8, hole 0.4, Top Layer to Bottom Layer, 15 vias
v3: diameter 0.6, hole 0.3, Top Layer to Bottom Layer, tented both sides, 8 vias
v4: diameter 0.6, hole 0.3, Top Layer to Bottom Layer, tented top, 5 vias
v5: diameter 0.8, hole 0.4, Top Layer to Bottom Layer, tented bottom, 4 vias
v6: diameter 0.6, hole 0.3, Top Layer to Bottom Layer, 2 vias
v7: diameter 0.6, hole 0.3, Top Layer to Bottom Layer, tented bottom, 1 vias
v8: diameter 0.8, hole 0.4, Top Layer to Bottom Layer, tented both sides, 1 vias

## Nets (pads, with @x,y where several pads share a name; then routed paths per layer and width w, separated by ;. In a path a pad name is that pad's centre, name@x,y a point inside that pad or via, vN(x,y) a via of type N, cw(c..) or ccw(c..) an arc to the next point about the centre after c; other vN are vias at no path point)
+3V3: C1.1 C2.2 C3.1 C4.2 C12.2 C16.2 C17.2 C22.1 C28.2 C29.2 IC1.9 IC1.24 IC1.36 IC1.48 J2.4 P1.4 P2.3 R2.2 R4.2 R7.2 R8.2 R9.2 R10.2 R12.1 R16.1 R18.2 TVS1.5 TVS2.5 U2.2 U2.4 | length 166.4
  Top Layer w0.3: P1.4 15.4,52.865 18.735,56.2 v2(19.055,56.2) ; v3(16.4,30.6) 16.45,30.55 IC1.48 ; v3(18,39.2) 18.05,39.2 19.25,38 IC1.36 ; IC1.9 23.25,28.131 23.6,27.781 v3(23.6,27.7) ; v6(24.716,33.363) 25.2,33.847 25.2,35.554 25.696,36.05 IC1.24
  Top Layer w1: v5(30.6,48.8) 31.218,48.8 34.462,48.8 36.1,47.162 36.1,46.775 R16.1 36.187,46.688 36.187,42.913 C16.2 C17.2 36.187,40.487 36.187,35.812 R9.2 R7.2 R8.2 R10.2 36.175,29 37.94,27.235 P2.3